# Altium PCB PCBProject_AdapterBoard_NTUInv.PcbDoc
Units mil, origin at the board's own origin, x right, y up, seen from the top; angles counter-clockwise.
Board outline 1830 x 1985 mil, 2 copper layers (Top Layer, Bottom Layer); 8 components, 26 nets, 77 pads, 2 vias.
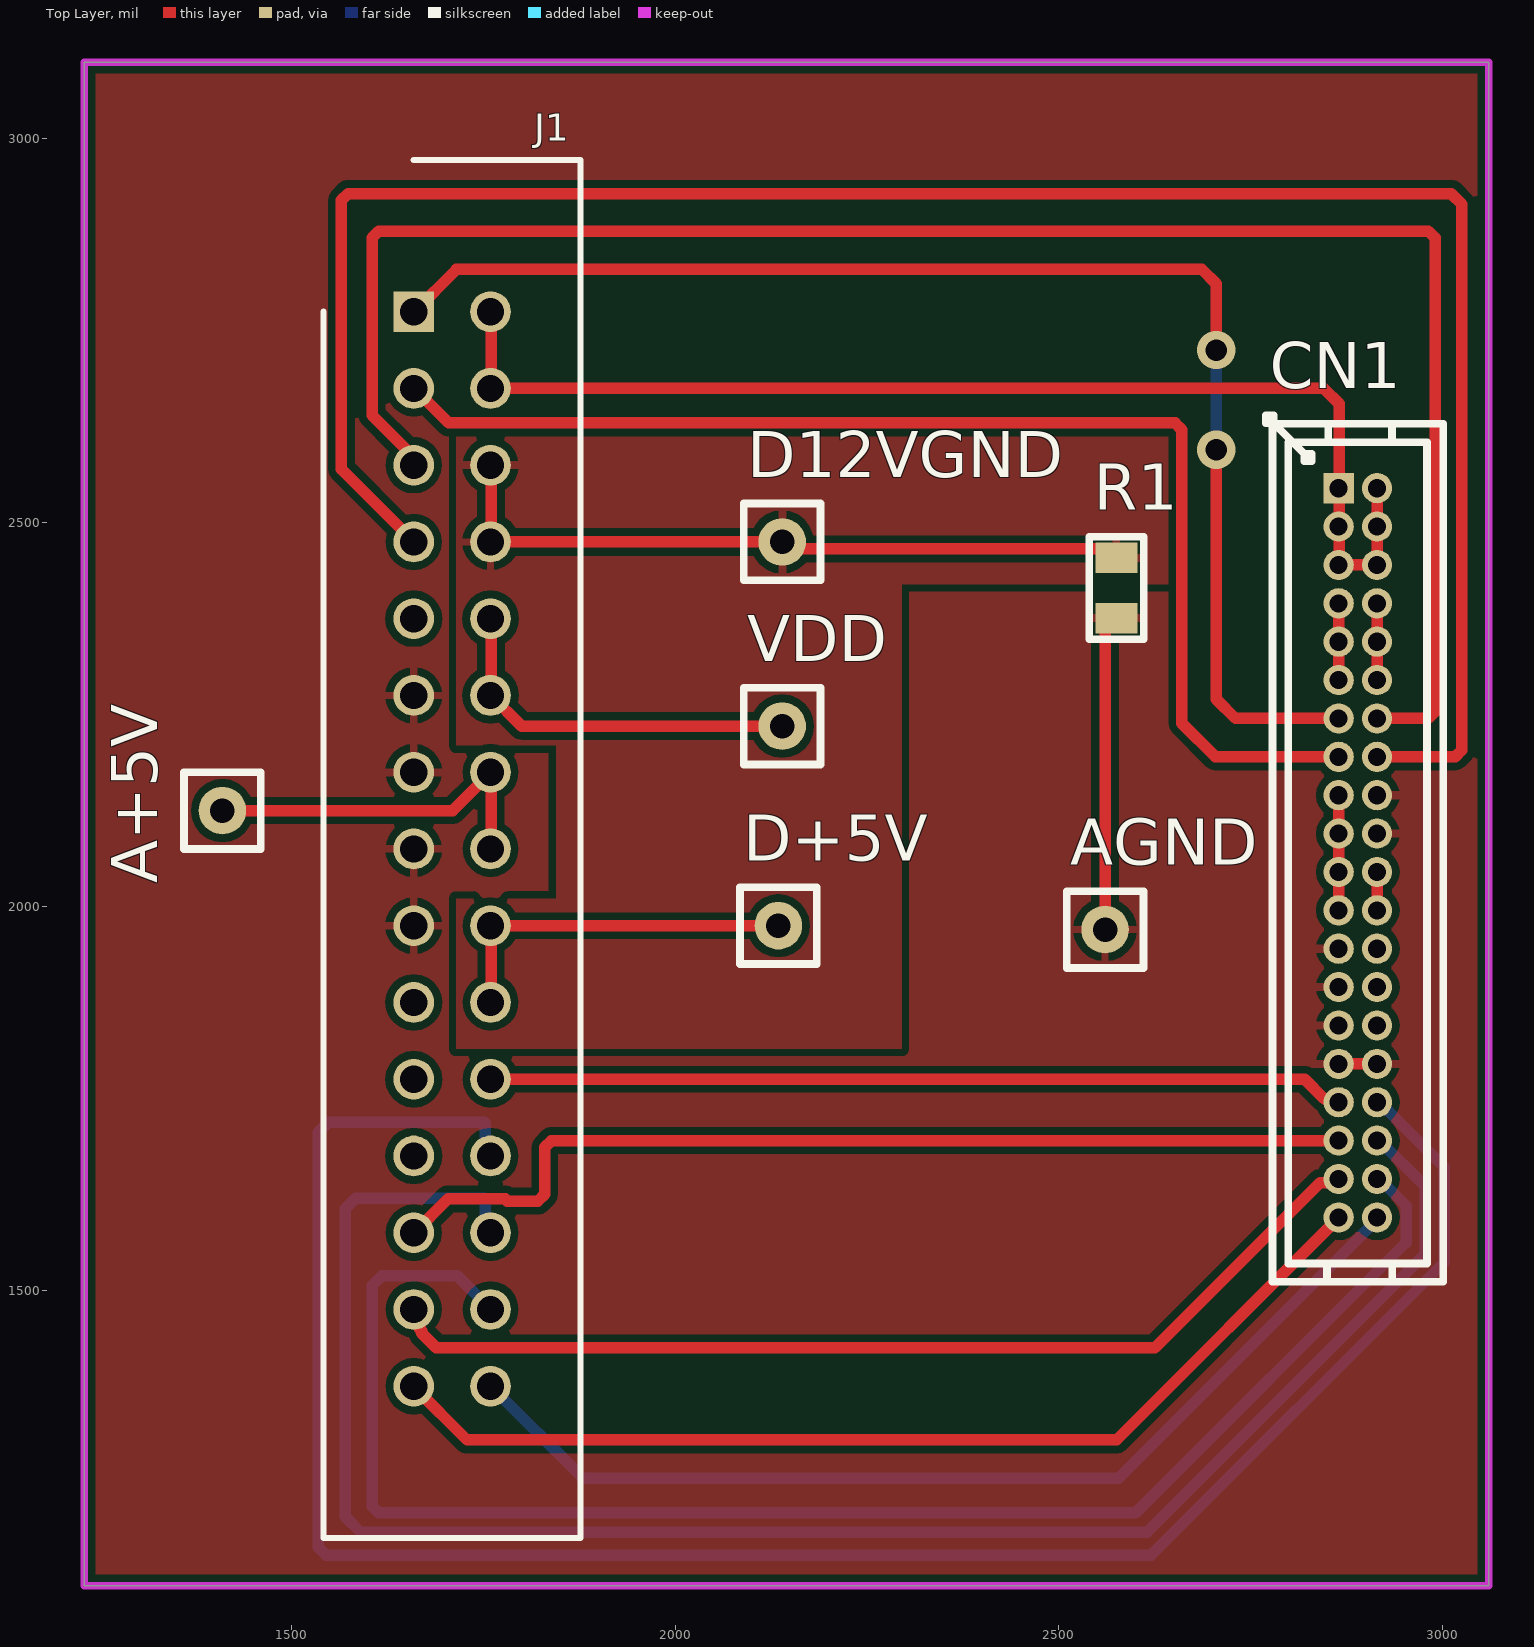
[diagram p0: Top Layer view]
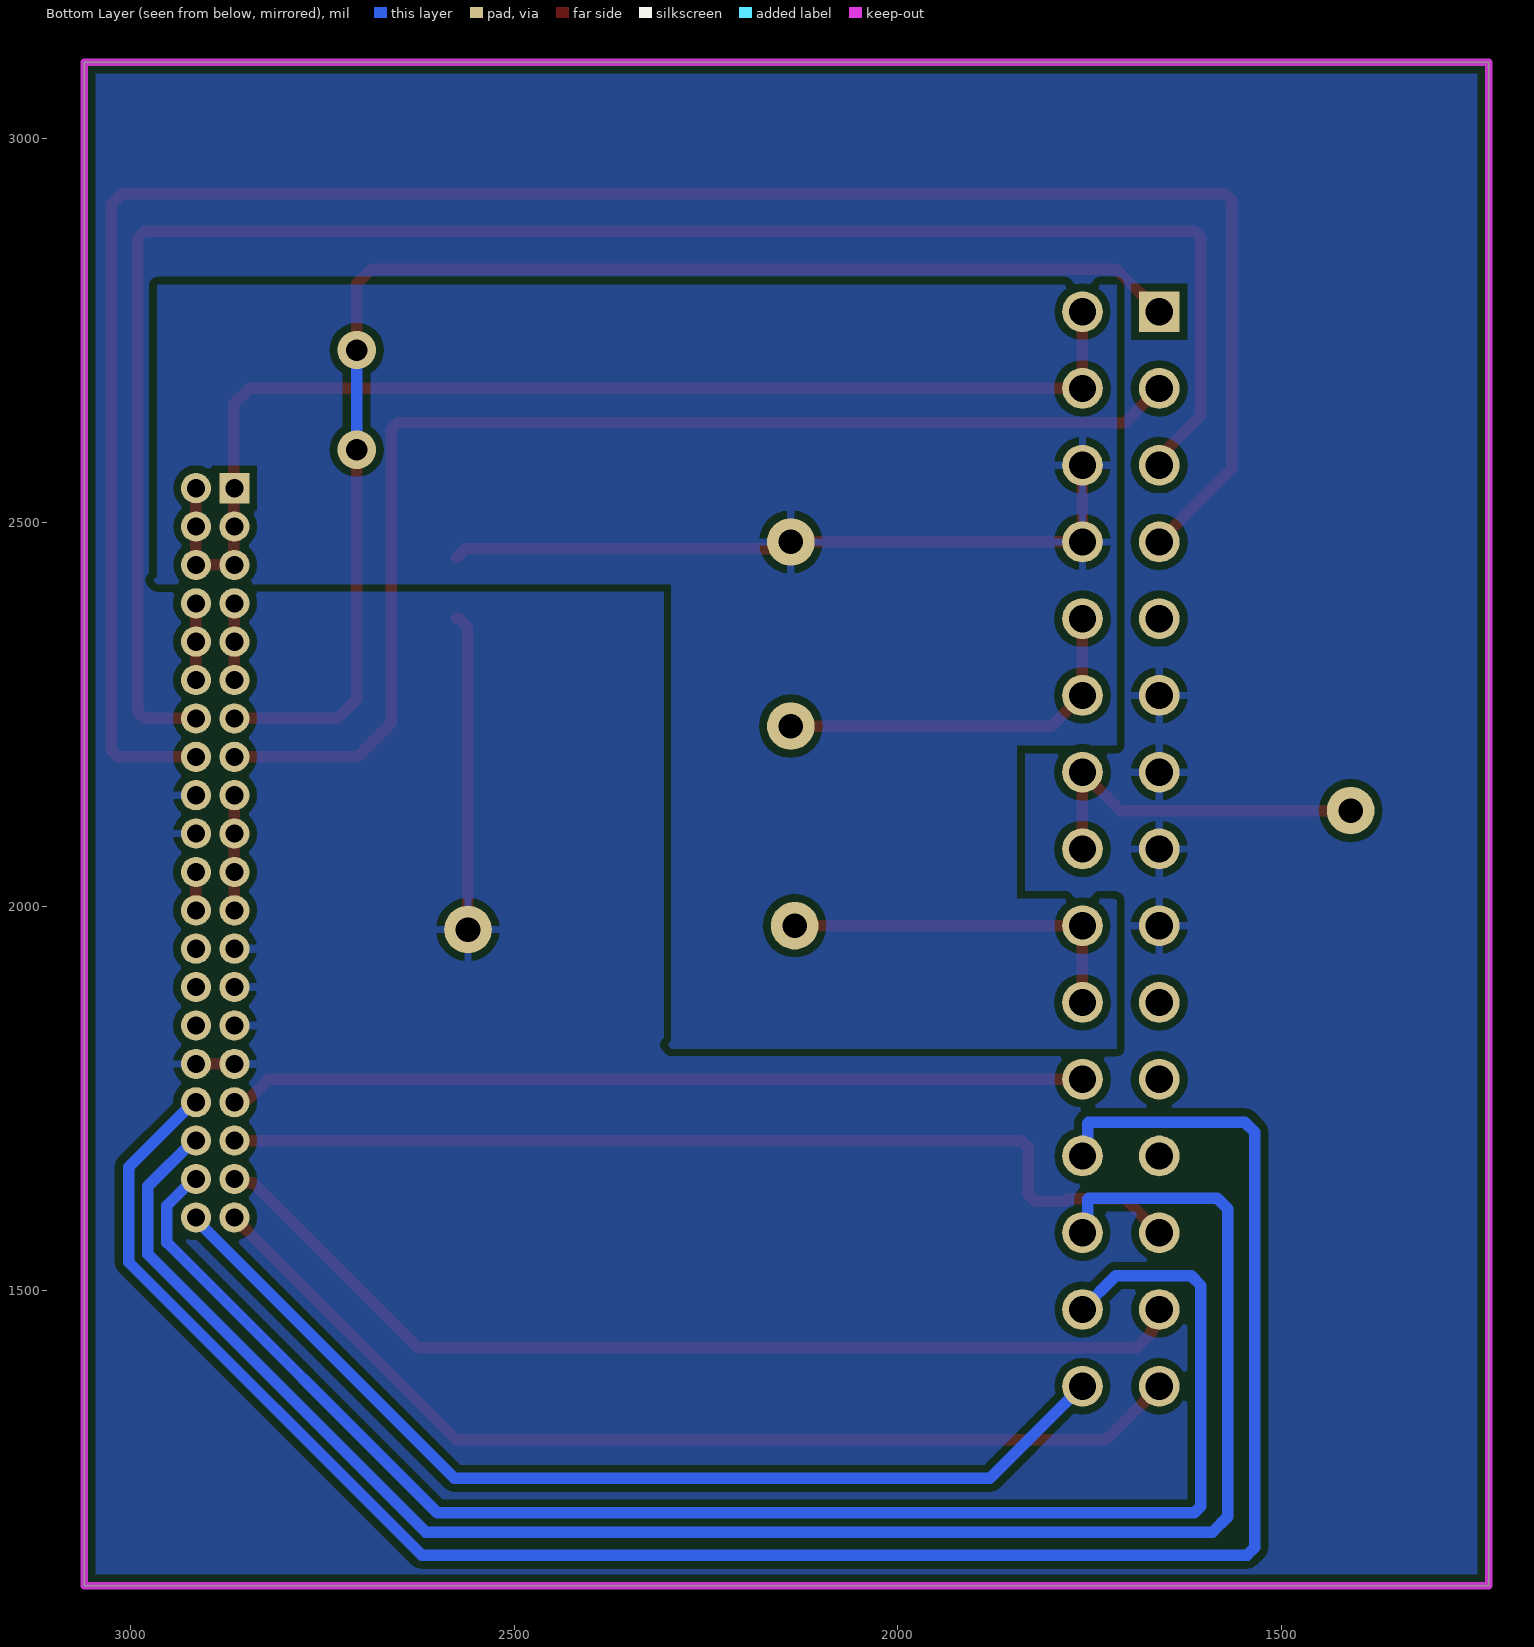
[diagram p1: Bottom Layer view, seen from below]

## Layer stack, top to bottom
Top Solder: solder mask 0.4, Solder Resist, Dk 3.5
Top Layer: signal copper 1.4
Dielectric 1: dielectric 12.6, FR-4, Dk 4.8
Bottom Layer: signal copper 1.4
Bottom Solder: solder mask 0.4, Solder Resist, Dk 3.5

## Board outline
1230,1115 3060,1115 3060,3010 3060,3100 1230,3100

## Design rules (kind name [scope] priority, off if disabled: settings)
Clearance [All] p1: gap=10 ignorepadtopadclearanceinfootprint=FALSE except(0: Arc-Hole Track-Hole SMDPad-Hole THPad-Hole Via-Hole Fill-Hole Poly-Hole Region-Hole Text-Hole)
MinimumSolderMaskSliver [All] p1: minsoldermaskwidth=2
PolygonConnect [All] p1: connectstyle=Relief reliefconductorwidth=10 reliefentries=4 polygonreliefangle="90 Angle" airgapwidth=10
RoutingVias [All] p1: holewidth=28 width=50 viastyle="Through Hole" minholewidth=28 minwidth=50 maxholewidth=28 maxwidth=50
SilkToSolderMaskClearance [IsPad] p1: minsilkscreentomaskgap=2 clearancetoexposedcopper=TRUE
SolderMaskExpansion [All] p1: expansion=4 istentingtop=FALSE
Width [All] p1: maxlimit=30 minlimit=10 preferedwidth=20
28 further rules are at their usual default settings.

## Components (designator, comment, footprint, x,y, rotation, side; value= is the part's Value field where it differs from the comment)
A+5V "A+5V测试点" TP 1410,2125 r90 top
AGND "AGND测试点" TP 2560,1970 r90 top
CN1 "3131-40SG0BK00T1" IDC-TH_3131-40SG0BK00T1 2889.37,2070 r270 top
D12VGND "D12VGND测试点" TP 2139.37,2475 r90 top
D+5V "D+5V测试点" TP 2134.37,1975 r90 top
J1 "HIF3FC-30PA-2.54DSA" SHDR30W50P254_2X15_4560X850X1200P 1659.37,2775 r270 top
R1 "0R" 0805 2575,2415 r270 top
VDD "VDD测试点" TP 2139.37,2235 r0 top

## Footprints (in the part's own frame and the unit in brackets; to place one, negate y for a bottom-side part, rotate by r counter-clockwise, add the part's x,y. Pads: shape width x height; smd on the part's side, far side on the other; paste and mask are expansions set on the pad)
0805 [mm]
  rect 1x1.4 smd: 1(-1,0) 2(1,0)
  silkscreen extent -1.7,-0.9 1.7,0.9
IDC-TH_3131-40SG0BK00T1 [mm]
  rect 1x1 hole 0.6: 1(-12.065,-0.635)
  round 1 hole 0.6: 2(-12.065,0.635) 3(-10.795,-0.635) 4(-10.795,0.635) 5(-9.525,-0.635) 6(-9.525,0.635) 7(-8.255,-0.635) 8(-8.255,0.635) 9(-6.985,-0.635) 10(-6.985,0.635) 11(-5.715,-0.635) 12(-5.715,0.635) 13(-4.445,-0.635) 14(-4.445,0.635) 15(-3.175,-0.635) 16(-3.175,0.635) 17(-1.905,-0.635) 18(-1.905,0.635) 19(-0.635,-0.635) 20(-0.635,0.635) 21(0.635,-0.635) 22(0.635,0.635) 23(1.905,-0.635) 24(1.905,0.635) 25(3.175,-0.635) 26(3.175,0.635) 27(4.445,-0.635) 28(4.445,0.635) 29(5.715,-0.635) 30(5.715,0.635) 31(6.985,-0.635) 32(6.985,0.635) 33(8.255,-0.635) 34(8.255,0.635) 35(9.525,-0.635) 36(9.525,0.635) 37(10.795,-0.635) 38(10.795,0.635) 39(12.065,-0.635) 40(12.065,0.635)
  silkscreen extent -14.48,-3.05 14.2,2.82
SHDR30W50P254_2X15_4560X850X1200P [mm]
  rect 1.35x1.35 hole 0.9: 1(0,0)
  round 1.35 hole 0.9: 2(0,2.54) 3(2.54,0) 4(2.54,2.54) 5(5.08,0) 6(5.08,2.54) 7(7.62,0) 8(7.62,2.54) 9(10.16,0) 10(10.16,2.54) 11(12.7,0) 12(12.7,2.54) 13(15.24,0) 14(15.24,2.54) 15(17.78,0) 16(17.78,2.54) 17(20.32,0) 18(20.32,2.54) 19(22.86,0) 20(22.86,2.54) 21(25.4,0) 22(25.4,2.54) 23(27.94,0) 24(27.94,2.54) 25(30.48,0) 26(30.48,2.54) 27(33.02,0) 28(33.02,2.54) 29(35.56,0) 30(35.56,2.54)
  silkscreen extent -5.02,-2.98 40.58,5.52, body extent -5.02,-2.98 40.58,5.52, height 12
TP [mil]
  round 62 hole 32: 1(0,0)
  silkscreen extent -50,-50 50,50

## Part data
A+5V AGND D12VGND D+5V VDD: library part 测试点
CN1: "连接器类型:简牛座;每排PIN数:20;排数:2;间距:1.27mm;行距:1.27mm;封装形式:直插;触头材质:黄铜;触头镀层:金;", JLCPCB Part Class="Extended Part", LCSC Part Name="每排P数:20 排数:2 1.27mm", Manufacturer=Wcon(维峰电子), Add into BOM=yes, Connector Type=简牛座, Contact Material=黄铜, Contact Plating=金, Convert to PCB=yes, Datasheet=https://atta.szlcsc.com/upload/public/pdf/source/20210304/C976754_BF257D3FF426E047B764690466F062CF.pdf, Device=3131-40SG0BK00T1, Holder Type=直插, Manufacturer Part=3131-40SG0BK00T1, Name=3131-40SG0BK00T1, Number of Rows=2, Pin Number in each Row=20, Pitch=1.27mm, Row Spacing=1.27mm, Supplier=LCSC, Supplier Footprint=插件,P=1.27mm, Supplier Part=C976754, Symbol=3131-40SG0BK00T1
J1: "Connector", Manufacturer_Name=Hirose, Manufacturer_Part_Number=HIF3FC-30PA-2.54DSA(71), Mouser Part Number=798-HIF3FC30PA254D71, Datasheet Link=https://datasheet.datasheetarchive.com/originals/distributors/SFDatasheet-7/sf-000141320.pdf, Height=12mm, Mouser Price/Stock=https://www.mouser.co.uk/ProductDetail/Hirose-Connector/HIF3FC-30PA-254DSA71?qs=eDUdFcBPps32%2FyAdBVx6ww%3D%3D, System=Connector
R1: library part Res2, "Resistor", LatestRevisionDate=17-Jul-2002, LatestRevisionNote="Re-released for DXP Platform.", PackageReference=AXIAL-0.4, Published=8-Jun-2000, Publisher="Altium Limited"

## Via types
v1: diameter 50, hole 28, Top Layer to Bottom Layer, 2 vias

## Nets (pads, with @x,y where several pads share a name; then routed paths per layer and width w, separated by ;. In a path a pad name is that pad's centre, name@x,y a point inside that pad or via, vN(x,y) a via of type N, cw(c..) or ccw(c..) an arc to the next point about the centre after c; other vN are vias at no path point)
AGND: AGND.1 CN1.18 CN1.20 CN1.25 CN1.27 CN1.29 CN1.31 CN1.32 J1.11 J1.13 J1.15 J1.17 R1.2 | length 463.5
  Top Layer w15: AGND.1 2560,2363.44 2572.19,2375.63 R1.2 ; CN1.31 CN1.32
D12V1: CN1.1 CN1.2 CN1.3 CN1.4 CN1.5 CN1.6 J1.2 J1.4 | length 1574.2
  Top Layer w15: J1.4 J1.4@1760,2675 ; J1.2@1760,2775 J1.4@1760,2675 ; CN1.5 CN1.5@2865,2445 ; CN1.1 2865,2545.63 2865,2655 2845,2675 J1.4@1760,2675 ; CN1.1@2865,2545 CN1.5@2865,2445 ; CN1.2 CN1.4 CN1.6 CN1.5@2865,2445
D12VGND: D12VGND.1 J1.6 J1.8 R1.1 | length 923.5
  Top Layer w15: J1.6@1760,2575 1760,2475 D12VGND.1 2148.36,2466.01 2563.36,2466.01 R1.1
DSP-PWM1A: CN1.35 J1.25 | length 1292.9
  Top Layer w15: J1.25@1660,1575 1704.07,1619.07 1778.26,1619.07 1781.12,1616.21 1821.21,1616.21 1830,1625 1830,1686.21 1838.79,1695 CN1.35@2865,1695
DSP-PWM1B: CN1.38 J1.28 | length 2062.4
  Bottom Layer w15: J1.28@1760,1475 1715.93,1519.07 1617.86,1519.07 1605,1506.21 1605,1218.79 1613.79,1210 2600,1210 2952.18,1562.18 2952.18,1610.4 2917.59,1645 CN1.38@2915,1645
DSP-PWM2A: CN1.36 J1.26 | length 2377.4
  Bottom Layer w15: J1.26@1760,1575 1752.7,1582.3 1752.7,1618.51 1751.21,1620 1583.79,1620 1570,1606.21 1570,1205 1590,1185 2615,1185 2977.18,1547.18 2977.18,1635.4 2917.59,1695 CN1.36@2915,1695
DSP-PWM2B: CN1.39 J1.29 | length 1354.8
  Top Layer w15: J1.29@1660,1375 1660,1373.79 1728.79,1305 2575,1305 CN1.39@2865,1595
DSP-PWM3A: CN1.37 J1.27 | length 1329.3
  Top Layer w15: J1.27@1660,1475 1667.3,1467.7 1667.3,1449.51 1669.67,1447.14 1669.67,1444.11 1688.79,1425 2625,1425 2840.34,1640.34 2860.34,1640.34 CN1.37@2865,1645
DSP-PWM3B: CN1.40 J1.30 | length 1347.1
  Bottom Layer w15: J1.30@1760,1375 1880,1255 2577.59,1255 2915,1592.41 CN1.40@2915,1595
DSP_PWM1_ENABLE: CN1.33 J1.22 | length 1117.4
  Top Layer w15: J1.22@1760,1775 2820,1775 2845.34,1749.66 2860.34,1749.66 CN1.33@2865,1745
DSP_PWM1_F\A\U\L\T\_\5\V\: CN1.34 J1.24 | length 2685.8
  Bottom Layer w15: J1.24@1760,1675 1752.7,1682.3 1752.7,1717.59 1751.21,1719.07 1547.86,1719.07 1535,1706.21 1535,1165 1545,1155 2620.36,1155 3002.18,1536.83 3002.18,1660.4 2917.59,1745 CN1.34@2915,1745
IPM_IU1: CN1.14 J1.5 | length 2407.3
  Top Layer w15: J1.5@1660,2575 1660,2585 1605,2640 1605,2871.21 1613.79,2880 2981.21,2880 2990,2871.21 2990,2253.79 2981.21,2245 CN1.14@2915,2245
IPM_IV1: CN1.15 J1.3 | length 1627.8
  Top Layer w15: J1.3@1660,2675 1705,2630 2651.21,2630 2660,2621.21 2660,2238.79 2703.79,2195 CN1.15@2865,2195
IPM_IW1: CN1.13 J1.1 | length 1787.1
  Top Layer w15: J1.1@1660,2775 1715,2830 2686.21,2830 2705,2811.21 v1(2705,2725) ; v1(2705,2595) 2705,2270 2730,2245 CN1.13@2865,2245
  Bottom Layer w15: v1(2705,2595) v1(2705,2725)
IPM_Temperature1: J1.9
IPM_TerminalDutyU1: J1.23
IPM_TerminalDutyV1: J1.21
IPM_TerminalDutyW1: J1.19
IPM_VDC_BUS1: CN1.16 J1.7 | length 2778.6
  Top Layer w15: J1.7@1660,2475 1565,2570 1565,2920 1573.79,2928.79 3011.21,2928.79 3025,2915 3025,2203.79 3016.21,2195 CN1.16@2915,2195
NetA+5V_1: A+5V.1 J1.14 J1.16 | length 470.7
  Top Layer w15: A+5V.1 1710,2125 1760,2175 J1.16@1760,2075
NetCN1_7: CN1.7 CN1.9 CN1.11 | length 100
  Top Layer w15: CN1.11 CN1.9 CN1.7
NetCN1_8: CN1.8 CN1.10 CN1.12 | length 100
  Top Layer w15: CN1.12 CN1.10 CN1.8
NetCN1_17: CN1.17 CN1.19 CN1.21 CN1.23 | length 150
  Top Layer w15: CN1.23 CN1.21 CN1.19 CN1.17
NetCN1_22: CN1.22 CN1.24 | length 50
  Top Layer w15: CN1.24 CN1.22
NetD+5V_1: D+5V.1 J1.18 J1.20 | length 475
  Top Layer w15: J1.20@1760,1875 1760,1975 D+5V.1@2135,1975
NetJ1_10: J1.10 J1.12 VDD.1 | length 496.6
  Top Layer w15: J1.10@1760,2375 1760,2275 1800,2235 VDD.1@2140,2235
pads on no net: CN1.26 CN1.28 CN1.30

## Polygon pours and split planes (outlines as drawn)
AGND on Bottom Layer "AGND_L02_P004" (solid, remove dead copper, pour order 4): 1230,3100 3060,3100 3060,1115 1230,1115
D12VGND on Bottom Layer "D12VGND" (solid, remove dead copper, pour order 0): 1715,2810 1715,2210 1845,2210 1845,2010 1720,2010 1715,2015 1715,1815 2295,1815 2300,1820 2295,1825 2295,2420 2810,2420 2965,2420 2970,2425 2965,2430 2965,2810
AGND on Top Layer "AGND_L01_P007" (solid, remove dead copper, pour order 7): 1230,3100 3060,3100 3060,1115 1230,1115
D12VGND on Top Layer "D12VGND_L01_P006" (solid, remove dead copper, pour order 6): 1715,2810 1720,2805 2965,2805 2965,2420 2295,2420 2295,1815 1715,1815 1715,2010 1845,2010 1845,2210 1715,2210

## Keep-outs
Keep-Out Layer:
  the board outline again, w10